# Altium PCB CONTROLLER_PCB.PcbDoc
Units mil, origin at the board's own origin, x right, y up, seen from the top; angles counter-clockwise.
Board outline 1999.6 x 999.6 mil, 2 copper layers (Top Layer, Bottom Layer); 34 components, 44 nets, 176 pads, 122 vias.
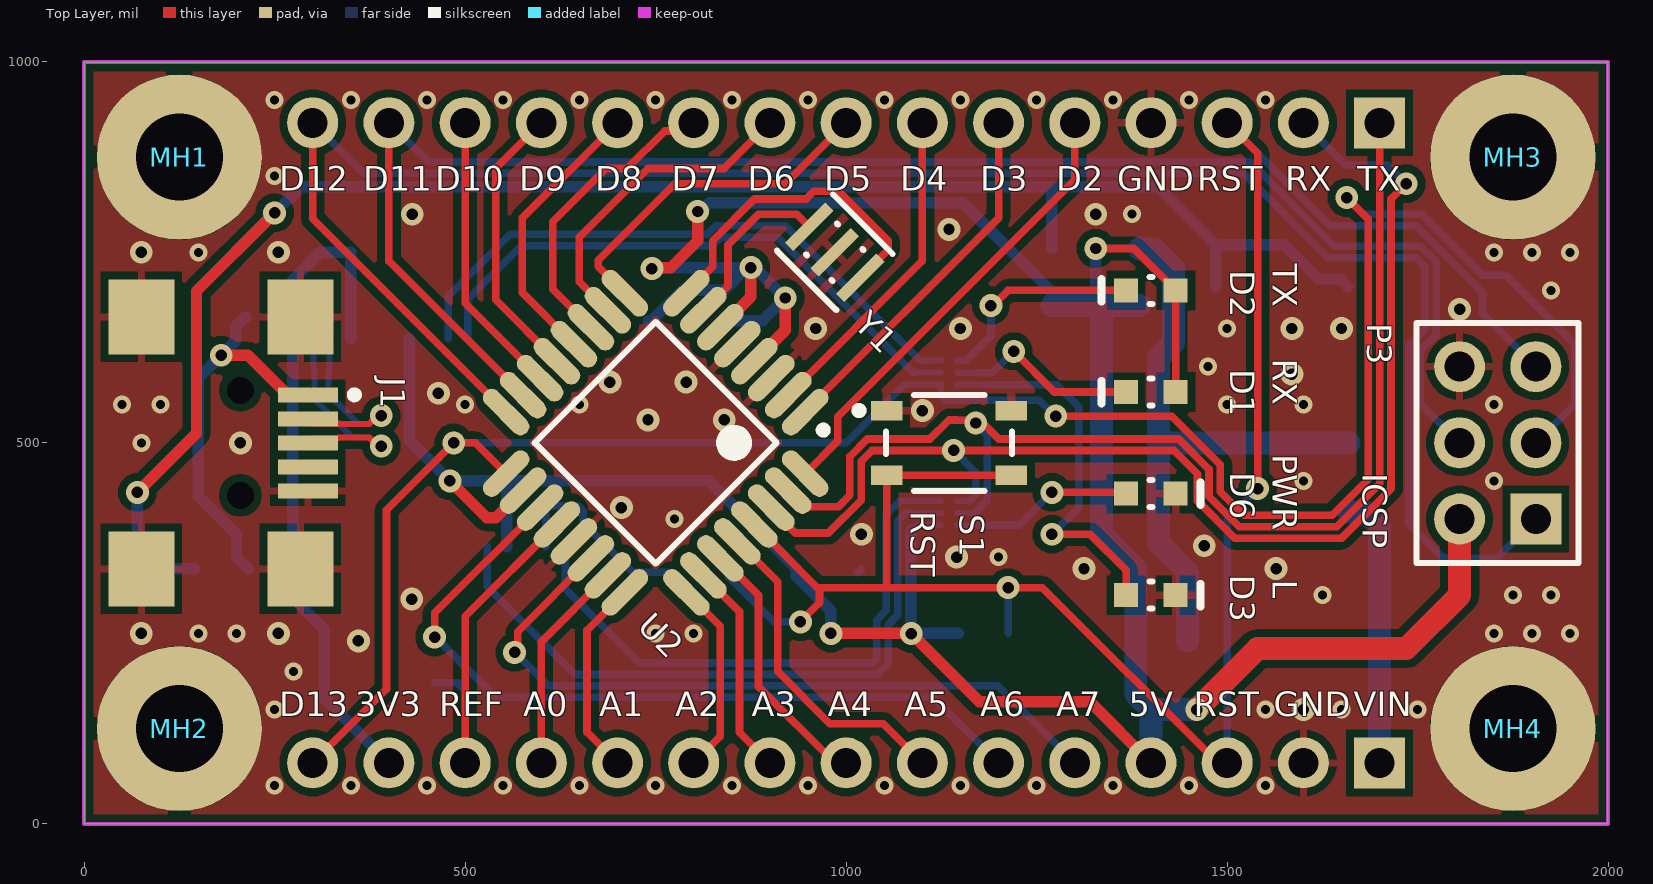
[diagram p0: Top Layer view]
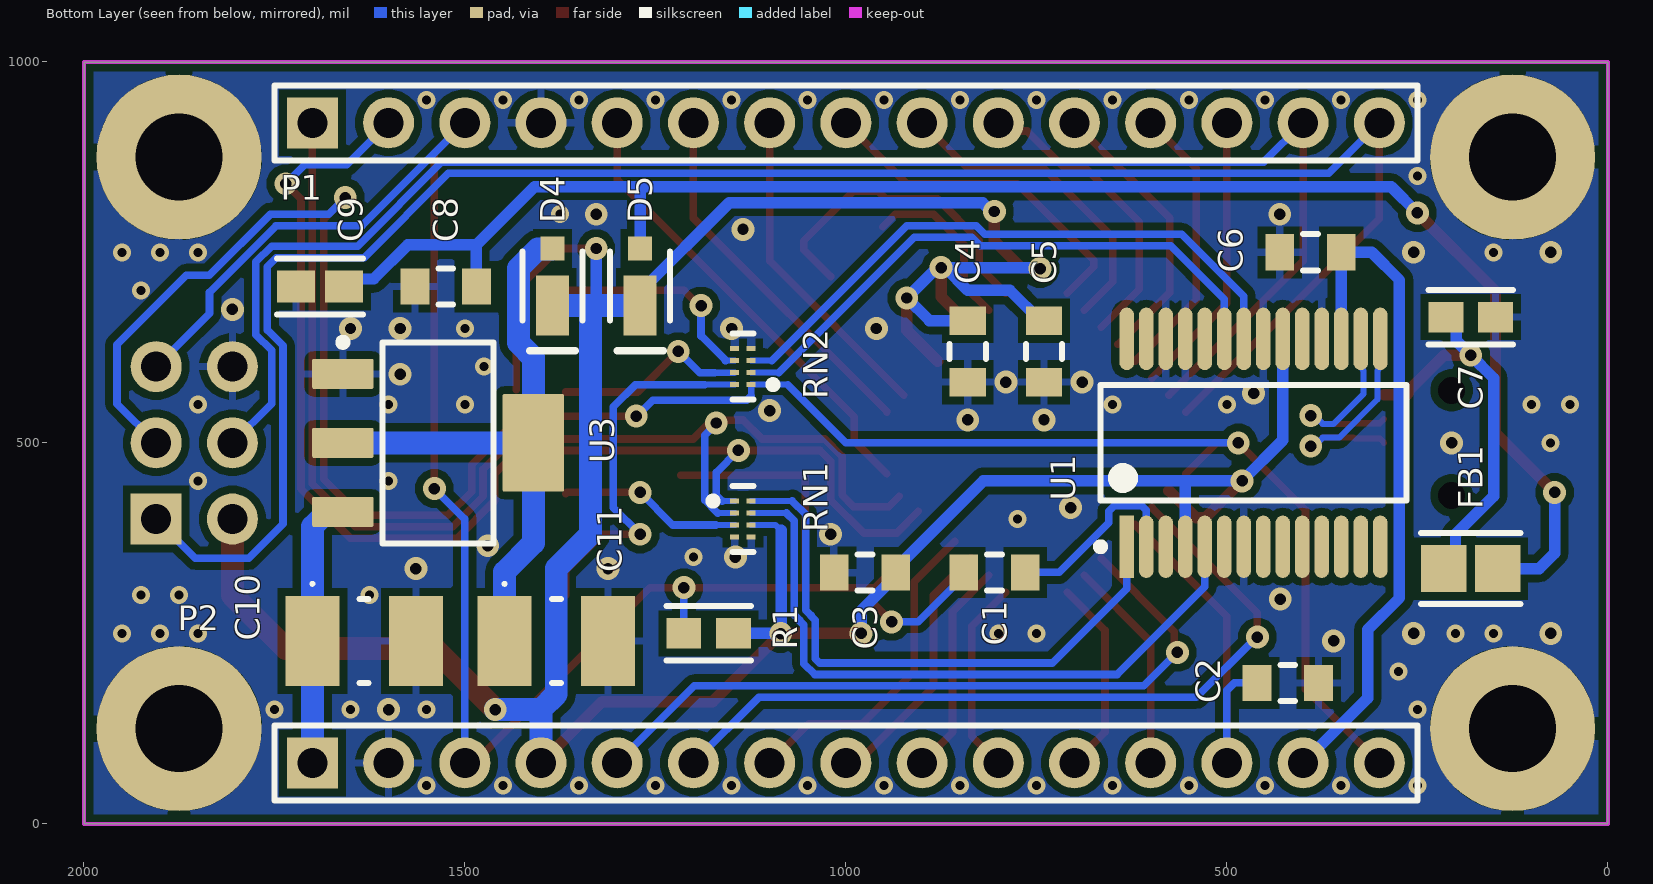
[diagram p1: Bottom Layer view, seen from below]
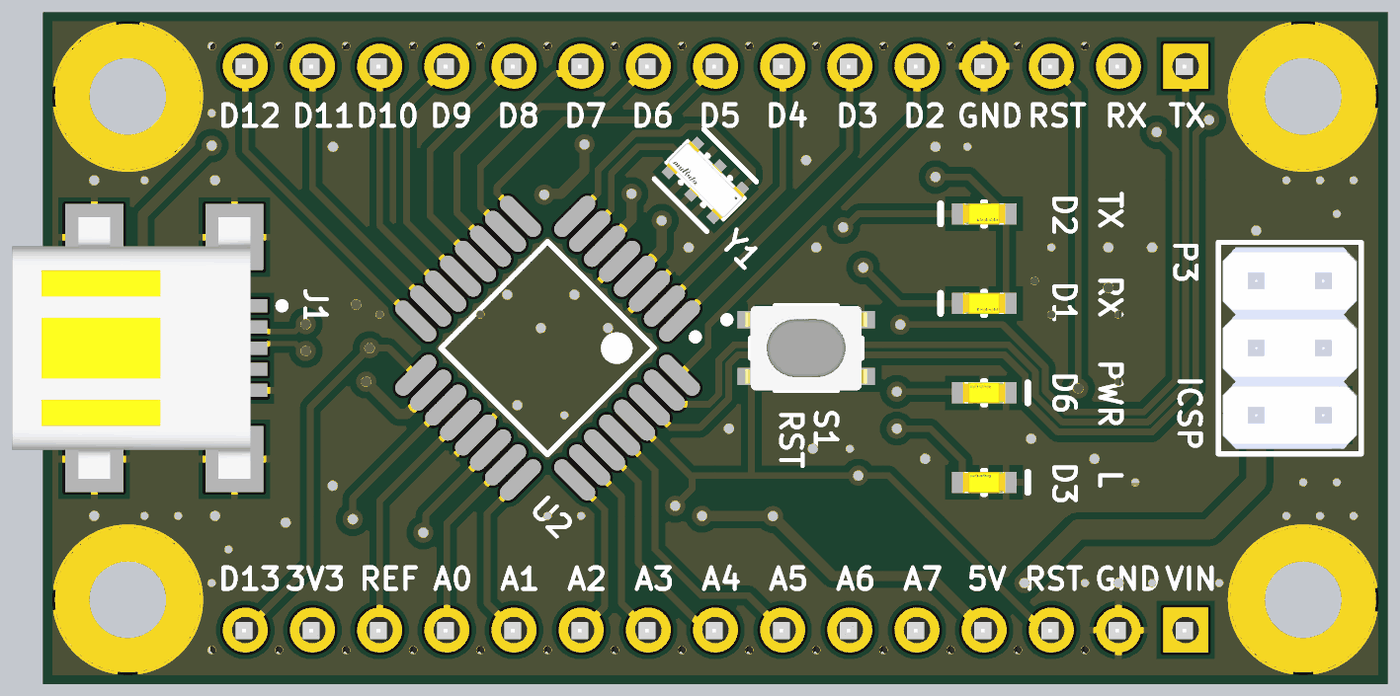
[diagram p2: 3D render of the assembled board from above, using the file's embedded part models]
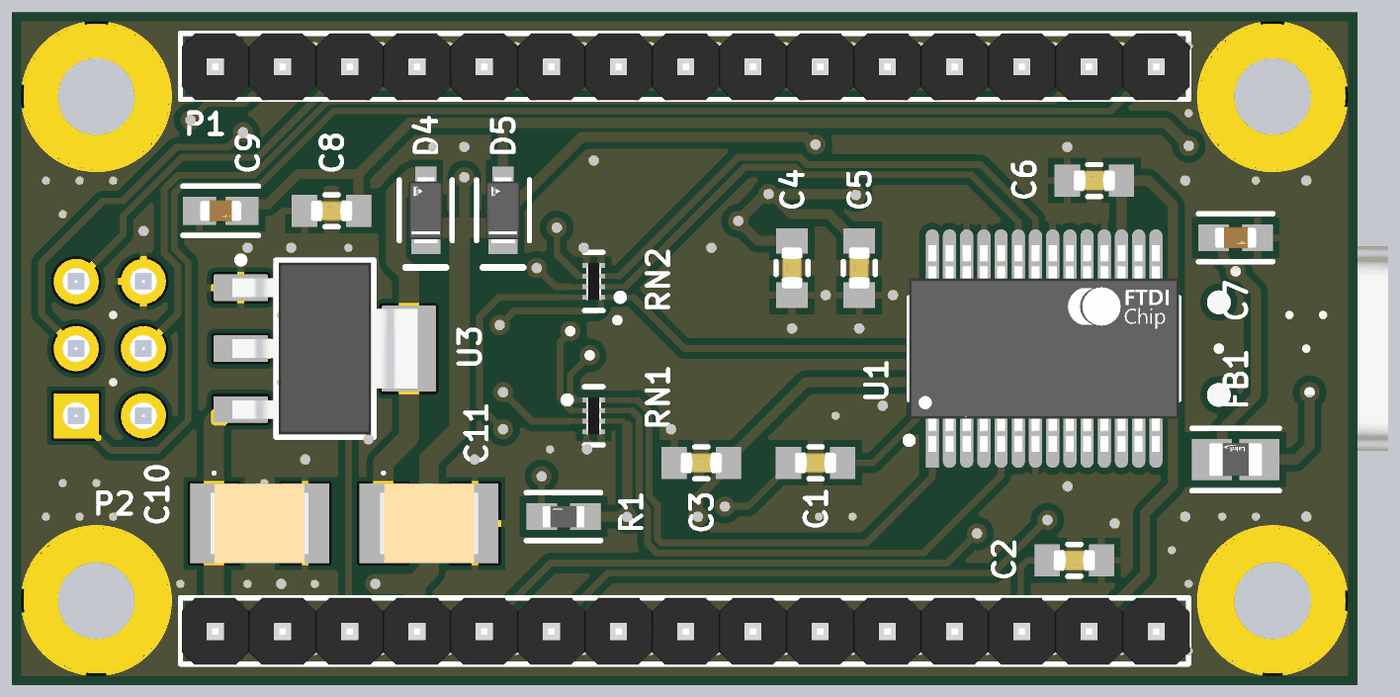
[diagram p3: 3D render of the assembled board from below, using the file's embedded part models]

## Layer stack, top to bottom
Top Solder: solder mask 0.4, Solder Resist, Dk 3.5
Top Layer: signal copper 1.4
Dielectric 1: dielectric 12.6, FR-4, Dk 4.8
Bottom Layer: signal copper 1.4
Bottom Solder: solder mask 0.4, Solder Resist, Dk 3.5

## Board outline
0,0 0,999.6 1999.6,999.6 1999.6,0

## Design rules (kind name [scope] priority, off if disabled: settings)
BoardOutlineClearance [All] p1: gap=7.87 ignorepadtopadclearanceinfootprint=FALSE
Clearance [All] p1: gap=10 ignorepadtopadclearanceinfootprint=TRUE except(0: Arc-Hole Track-Hole SMDPad-Hole THPad-Hole Via-Hole Fill-Hole Poly-Hole Region-Hole Text-Hole; 5: Arc-Arc Arc-Track Track-Track SMDPad-SMDPad; 7.87: Arc-SMDPad Track-SMDPad; 12.99: Arc-THPad Track-THPad; 19.68: THPad-THPad)
DiffPairsRouting DiffPair_90DiffPairsRouting [InDifferentialPairClass('Diff_90')] p1: maxlimit=10 minlimit=10 mostfreqgap=10 toplayer_minwidth=8 toplayer_maxwidth=8 toplayer_prefwidth=8 bottomlayer_minwidth=8 bottomlayer_maxwidth=8 bottomlayer_prefwidth=8 maxuncoupledlength=500
DiffPairsRouting [All] p2: maxlimit=10 minlimit=10 mostfreqgap=10 toplayer_minwidth=15 toplayer_maxwidth=15 toplayer_prefwidth=15 bottomlayer_minwidth=15 bottomlayer_maxwidth=15 bottomlayer_prefwidth=15 maxuncoupledlength=500
HoleSize [All] p1: absolutevalues=TRUE maxlimit=248.03 minlimit=11.81 maxpercent=80.000 minpercent=20.000
MatchedLengths DiffPair_90MatchedLengths [InDifferentialPairClass('Diff_90')] p1: tolerance=1000 checknetsindiffpair=FALSE checkdiffpairvsdiffpair=TRUE checkxsignals=TRUE checkothers=TRUE
MinimumAnnularRing [All] p1: minimumring=5.12
MinimumSolderMaskSliver [All] p1: minsoldermaskwidth=7.87
PolygonConnect PolygonConnect_GNDVia [IsVia AND InNet('GND')] p1: connectstyle=Direct reliefconductorwidth=10 reliefentries=4 polygonreliefangle="90 Angle" airgapwidth=10
PolygonConnect PolygonConnect_1 [All] p2 off: connectstyle=Relief reliefconductorwidth=10 reliefentries=4 polygonreliefangle="90 Angle" airgapwidth=10
RoutingVias [All] p1: holewidth=28 width=50 viastyle="Through Hole" minholewidth=11.81 minwidth=23.62 maxholewidth=248.03 maxwidth=50
SilkToSolderMaskClearance [IsPad] p1: minsilkscreentomaskgap=5.91 clearancetoexposedcopper=TRUE
SolderMaskExpansion [All] p1: expansion=4 istentingtop=FALSE
Width [All] p1: maxlimit=787.4 minlimit=5 preferedwidth=10 minimp=50.000000 maximp=50.000000 favimp=50.000000
26 further rules are at their usual default settings.

## Classes and differential pairs
differential pair class Diff_90: USBD
differential pair USBD: +USBD_P -USBD_N

## Components (designator, comment, footprint, x,y, rotation, side; value= is the part's Value field where it differs from the comment)
C1 "100nF" CAP_0603_TDK_CGA3 805,330 r180 bottom
C2 "100nF" CAP_0603_TDK_CGA3 420,185 r0 bottom
C3 "100nF" CAP_0603_TDK_CGA3 975,330 r180 bottom
C4 "100nF" CAP_0603_TDK_CGA3 840,620 r90 bottom
C5 "100nF" CAP_0603_TDK_CGA3 740,620 r90 bottom
C6 "100nF" CAP_0603_TDK_CGA3 390.2,750 r180 bottom
C7 "10nF" CAP_0603_MRT_GCM 180,665 r180 bottom
C8 "100nF" CAP_0603_TDK_CGA3 1525,705 r180 bottom
C9 "4.7uF" CAP_0603_MRT_GRT 1690,705 r180 bottom
C10 "10uF" PCAP_1411_VSH_TR3B 1632.09,240 r180 bottom
C11 "10uF" PCAP_1411_VSH_TR3B 1380,240 r180 bottom
D1 "GREEN" DIO_LED_GREEN_1608_APT1608 1400,566.67 r0 top
D2 "GREEN" DIO_LED_GREEN_1608_APT1608 1400,700 r0 top
D3 "GREEN" DIO_LED_GREEN_1608_APT1608 1400,300 r180 top
D4 "30V, 1A" DIO_SCHOTTKY_DO_219AP 1385,705.79 r90 bottom
D5 "30V, 1A" DIO_SCHOTTKY_DO_219AP 1270,705.79 r90 bottom
D6 "GREEN" DIO_LED_GREEN_1608_APT1608 1400,433.33 r180 top
FB1 "40X" FERRITE_0805_LRD_MI 180,335 r0 bottom
J1 "UX60A-MB-5ST" CONN_USB_MINIB_FEMALE_SMD_RA 205,500 r270 top locked
MH1 "M2.5" MH_M2.5 125,875 r0 top
MH2 "M2.5" MH_M2.5 125,125 r0 top
MH3 "M2.5" MH_M2.5 1875,875 r0 top
MH4 "M2.5" MH_M2.5 1875,125 r0 top
P1 "PEC15SFAN" CONN_HEADER_MALE_0.1_1x15 1000,920 r90 bottom
P2 "PEC15SFAN" CONN_HEADER_MALE_0.1_1x15 1000,80 r90 bottom
P3 "PEC03DAAN" CONN_HEADER_MALE_0.1_2x3 1855,500 r90 top
R1 "4.7kR" RES_0603_RHM_ESR 1180,250 r180 bottom
RN1 "1kR" RES_NET_0502_PNS_EXB 1135,400 r270 bottom locked
RN2 "1kR" RES_NET_0502_PNS_EXB 1135,600 r90 bottom locked
S1 "PTS810" SW_CAK_PTS810 1135,500 r0 top
U1 "FT232RL" IC_SSOP_28 465,500 r90 bottom locked
U2 "ATMEGA328" IC_32_TQFP_32A 750,500 r225 top locked
U3 "LM1117" IC_SOT223_4_DCYRPDSOG4 1535,500 r180 bottom locked
Y1 "16MHz" OSC_NONSTD_SMD3_MRT_CSTNE 985,750 r315 top

## Footprints (in the part's own frame and the unit in brackets; to place one, negate y for a bottom-side part, rotate by r counter-clockwise, add the part's x,y. Pads: shape width x height; smd on the part's side, far side on the other; paste and mask are expansions set on the pad)
CAP_0603_MRT_GCM [mil] "Capacitor"
  rect 45.62x39.85 smd paste+0 mask+0: 1(-32.55,0) 2(32.55,0)
  silkscreen extent -55,-36 55,36, body extent -31,-16 31,16, height 35
CAP_0603_MRT_GRT [mil] "Capacitor"
  rect 49.46x41.66 smd paste+0 mask+0: 1(-31.53,0) 2(31.53,0)
  silkscreen extent -56,-37 56,37, body extent -31,-16 31,16, height 37
CAP_0603_TDK_CGA3 [mm] "Capacitor"
  rect 0.956x1.206 smd paste+0 mask+0: 1(-1.025,0) 2(1.025,0)
  silkscreen extent -0.25,-0.6 0.25,0.6, body extent -0.8,-0.4 0.8,0.4, height 1.1
CONN_HEADER_MALE_0.1_1x15 [mm] "Connector"
  rect 1.7x1.7 hole 1: 1(0,17.78)
  round 1.7 hole 1: 2(0,15.24) 3(0,12.7) 4(0,10.16) 5(0,7.62) 6(0,5.08) 7(0,2.54) 8(0,0) 9(0,-2.54) 10(0,-5.08) 11(0,-7.62) 12(0,-10.16) 13(0,-12.7) 14(0,-15.24) 15(0,-17.78)
  silkscreen extent -1.25,-19.05 1.25,19.05, body extent -1.29,-19.1 1.25,19, height 10.49
CONN_HEADER_MALE_0.1_2x3 [mm] "Connector"
  rect 1.7x1.7 hole 1: 1(-2.54,-1.27)
  round 1.7 hole 1: 2(-2.54,1.27) 3(0,-1.27) 4(0,1.27) 5(2.54,-1.27) 6(2.54,1.27)
  silkscreen extent -4,-2.7 4,2.7, body extent -3.81,-2.54 3.81,2.54, height 8.25
CONN_USB_MINIB_FEMALE_SMD_RA [mm] "SMD, 5-Leads, Body 7.7x9mm, Pitch 0.8mm"
  rect 0.5x2 smd: 1(-1.6,2.25) 2(-0.8,2.25) 3(0,2.25) 4(0.8,2.25) 5(1.6,2.25)
  rect 2.5x2.2 smd: 6(-4.2,2) 7(4.2,2) 8(-4.2,-3.3) 9(4.2,-3.3)
  round 0.6 hole 0.9 unplated: 10(-1.75,0) 11(1.75,0)
  silkscreen extent -1.72,3.68 -1.48,3.93, body extent -4.95,-6.4 4.95,2.6, height 4.6
DIO_LED_GREEN_1608_APT1608 [mm] "Diode, Green LED"
  rect 0.8x0.8 smd paste+0 mask+0: 1(-0.825,0) 2(0.825,0)
  silkscreen extent -1.65,-0.45 0.05,0.45, body extent -1.33,-0.55 1.33,0.55, height 0.25
DIO_SCHOTTKY_DO_219AP [mm] "Diode, Schottky"
  rect 0.8x0.8 smd paste+0 mask+0: A(1.25,0)
  rect 2x1.1 smd paste+0 mask+0: K(-0.65,0)
  silkscreen extent -2.16,-1 1.15,1, body extent -1.25,-0.65 1.25,0.65, height 0.73
FERRITE_0805_LRD_MI [mil] "Ferrite Bead"
  rect 59.63x61.27 smd paste+0 mask+0: 1(-35.27,0) 2(35.27,0)
  silkscreen extent -65,-46 65,46, body extent -39,-25 39,25, height 43
IC_32_TQFP_32A [mm] "Thin QFP, 32-Leads, Body 7x7mm, Pitch 0.8mm, IPC Low Density"
  oval 1.95x0.6 smd: 1(-4.25,2.8) 2(-4.25,2) 3(-4.25,1.2) 4(-4.25,0.4) 5(-4.25,-0.4) 6(-4.25,-1.2) 7(-4.25,-2) 8(-4.25,-2.8) 17(4.25,-2.8) 18(4.25,-2) 19(4.25,-1.2) 20(4.25,-0.4) 21(4.25,0.4) 22(4.25,1.2) 23(4.25,2) 24(4.25,2.8)
  oval 0.6x1.95 smd: 9(-2.8,-4.25) 10(-2,-4.25) 11(-1.2,-4.25) 12(-0.4,-4.25) 13(0.4,-4.25) 14(1.2,-4.25) 15(2,-4.25) 16(2.8,-4.25) 25(2.8,4.25) 26(2,4.25) 27(1.2,4.25) 28(0.4,4.25) 29(-0.4,4.25) 30(-1.2,4.25) 31(-2,4.25) 32(-2.8,4.25)
  silkscreen extent -4.37,-2.85 2.85,3.77, body extent -3.5,-3.5 3.5,3.5, height 1.2
IC_SOT223_4_DCYRPDSOG4 [mm] "SOT223, 4-Leads, Body 6.7x3.7mm, Pitch 2.3mm, IPC Low Density"
  rrect10% 2.05x1 smd: 1(-3.175,2.3) 2(-3.175,0) 3(-3.175,-2.3)
  rrect5% 2.05x3.25 smd: 4(3.175,0)
  silkscreen extent -3.3,-3.35 1.85,3.47, body extent -3.5,-3.25 3.5,3.25, height 1.62
IC_SSOP_28 [mm] "Integrated Circuit"
  rect 2.082x0.495 smd paste+0 mask+0: 1(-3.464,4.225)
  rrect100% 2.082x0.495 smd paste+0 mask+0: 2(-3.464,3.575) 3(-3.464,2.925) 4(-3.464,2.275) 5(-3.464,1.625) 6(-3.464,0.975) 7(-3.464,0.325) 8(-3.464,-0.325) 9(-3.464,-0.975) 10(-3.464,-1.625) 11(-3.464,-2.275) 12(-3.464,-2.925) 13(-3.464,-3.575) 14(-3.464,-4.225) 15(3.464,-4.225) 16(3.464,-3.575) 17(3.464,-2.925) 18(3.464,-2.275) 19(3.464,-1.625) 20(3.464,-0.975) 21(3.464,-0.325) 22(3.464,0.325) 23(3.464,0.975) 24(3.464,1.625) 25(3.464,2.275) 26(3.464,2.925) 27(3.464,3.575) 28(3.464,4.225)
  silkscreen extent -3.59,-5.1 1.92,5.23, body extent -3.9,-5.1 3.9,5.1, height 2
MH_M2.5 [mm] "Mounting Holes, M2.5"
  round 5.5 hole 2.9: 1(0,0)
OSC_NONSTD_SMD3_MRT_CSTNE [mm] "Oscillator"
  rect 0.4x1.9 smd paste+0 mask+0: 1(-1.2,0) 2(0,0) 3(1.2,0)
  silkscreen extent -1.4,-1.33 1.4,1.33, body extent -1.78,-1.05 1.78,1.05, height 0.25
PCAP_1411_VSH_TR3B [mm] "Polarized Capacitor"
  rect 1.8x3 smd: 1(-1.725,0) 2(1.725,0)
  silkscreen extent -1.77,-1.4 0.15,1.95, body extent -1.85,-1.5 1.85,1.5, height 2.12
RES_0603_RHM_ESR [mil] "Resistor"
  rect 45.6x39.85 smd paste+0 mask+0: 1(-32.56,0) 2(32.56,0)
  silkscreen extent -55,-36 55,36, body extent -31,-16 31,16, height 22
RES_NET_0502_PNS_EXB [mm] "Resistor Network"
  rect 0.175x0.3 smd paste+0 mask+0: 1(-0.6,-0.275) 2(-0.2,-0.275) 3(0.2,-0.275) 4(0.6,-0.275) 5(0.6,0.275) 6(0.2,0.275) 7(-0.2,0.275) 8(-0.6,0.275)
  silkscreen extent -1.1,-1.13 1.1,0.35, body extent -0.7,-0.3 0.7,0.3, height 0.45
SW_CAK_PTS810 [mm] "Switch"
  rect 1.05x0.65 smd paste+0 mask+0: 1(-2.075,1.075) 2(2.075,1.075) 3(-2.075,-1.075) 4(2.075,-1.075)
  silkscreen extent -3.12,-1.6 2.1,1.6, body extent -2.7,-1.7 2.7,1.7, height 0.25

## Part data
C1 C2 C3 C4 C5 C6 C8: library part CAP_100nF_10%_50V, "±10% 50V Ceramic Capacitor X7R 0603 (1608 Metric)", Case/Package="0603 (1608 Metric)", Manufacturer="TDK Corporation", Manufacturer Part Number=CGA3E2X7R1H104K080AA, Supplier Part Number 1=445-5666-1-ND, Supplier 1=Digi-Key
C7: library part CAP_10nF_10%_100V, "±10% 100V Ceramic Capacitor X7R 0603 (1608 Metric)", Case/Package="0603 (1608 Metric)", Manufacturer="Murata Electronics", Manufacturer Part Number=GCM188R72A103KA37D, Supplier Part Number 1=490-4781-1-ND, Supplier 1=Digi-Key
C9: library part CAP_4.7uF_10%_25V, "±10% 25V Ceramic Capacitor X5R 0603 (1608 Metric)", Case/Package="0603 (1608 Metric)", Manufacturer="Murata Electronics", Manufacturer Part Number=GRT188R61E475KE13D, Supplier Part Number 1=490-12328-1-ND, Supplier 1=Digi-Key
C10 C11: library part PCAP_10uF_10%_25V, "Molded Tantalum Capacitors 1411 (3528 Metric) 1.1Ohm", Case/Package="1411 (3528 Metric)", Manufacturer="Vishay Sprague", Manufacturer Part Number=TR3B106K025C1100, Supplier Part Number 1=718-1312-1-ND, Supplier 1=Digi-Key
D1 D2 D3 D6: library part DIO_LED_GREEN, "Green 570nm LED Indication - Discrete 2.1V 0603 (1608 Metric)", Case/Package="0603 (1608 Metric)", Manufacturer=Kingbright, Manufacturer Part Number=APT1608CGCK, Supplier Part Number 1=754-1116-1-ND, Supplier 1=Digi-Key
D4 D5: library part DIO_SCHOTTKY_30V_1A, "Diode Schottky 1A Surface Mount MicroSMP (DO-219AD)", Case/Package="MicroSMP (DO-219AD)", Manufacturer="Vishay General Semiconductor - Diodes Division", Manufacturer Part Number=MSS1P3L-M3/89A, Supplier Part Number 1=MSS1P3L-M3/89AGICT-ND, Supplier 1=Digi-Key
FB1: library part FERRITE_40X_1.5A, "Power Line Ferrite Bead 0805 (2012 Metric) 1.5A 50mOhm", Case/Package="0805 (2012 Metric)", Manufacturer="Laird-Signal Integrity Products", Manufacturer Part Number=MI0805K400R-10, Supplier Part Number 1=240-2389-1-ND, Supplier 1=Digi-Key
J1: library part CONN_USB_MINIB_FEMALE_SMD_RA, "USB - mini B USB 2.0 Receptacle Connector 5 Position Surface Mount, Right Angle", Case/Package="USB - mini B", Manufacturer="Hirose Electric Co LtdInc.", Supplier Part Number 1=H2961CT-ND, Manufacturer Part Number=UX60A-MB-5ST, Supplier 1=Digi-Key
MH1 MH2 MH3 MH4: library part MH_M2.5, "M2.5 Mounting Hole"
P1 P2: library part CONN_VERT_HEADER_MALE_0.1_1x15, "Connector Header Through Hole 15 position 0.100\" (2.54mm)", Case/Package="Header, Breakaway", Manufacturer="Sullins Connector Solutions", Supplier Part Number 1=S1212E-15-ND, Manufacturer Part Number=PEC15SFAN, Supplier 1=Digi-Key
P3: library part CONN_VERT_HEADER_MALE_0.1_2x3, "Connector Header Through Hole 6 position 0.100\" (2.54mm)", Case/Package="Header, Breakaway", Manufacturer="Sullins Connector Solutions", Supplier Part Number 1=S2012E-03-ND, Manufacturer Part Number=PEC03DAAN, Supplier 1=Digi-Key
R1: library part RES_4.7kR_5%_0.25W, "±5% 0.25W, 1/4W Chip Resistor 0603 (1608 Metric) Automotive AEC-Q200, Pulse Withstanding Thick Film", Case/Package="0603 (1608 Metric)", Manufacturer="Rohm Semiconductor", Manufacturer Part Number=ESR03EZPJ472, Supplier Part Number 1=RHM4.7KDCT-ND, Supplier 1=Digi-Key
RN1 RN2: library part RES_NET_1kR_5%_31mW, "1k Ohm ±5% 31mW Power Per Element Isolated 4 Resistor Network/Array ±200ppm/°C 0502 (1406 Metric), Long Side Terminals", Case/Package="0502 (1406 Metric), Long Side Terminal", Manufacturer="Panasonic Electronic Components", Manufacturer Part Number=EXB-18V102JX, Supplier Part Number 1=Y6102CT-ND, Supplier 1=Digi-Key
S1: library part SW_SPST_NO, "Tactile Switch SPST-NO Top Actuated Surface Mount", Case/Package="4.20mm x 3.20mm", Manufacturer=C&K, Manufacturer Part Number="PTS810 SJG 250 SMTR LFS", Supplier Part Number 1=CKN10504CT-ND, Supplier 1=Digi-Key
U1: library part IC_FT232RL, "USB Bridge, USB to UART USB 2.0 UART Interface 28-SSOP", Case/Package="28-SSOP (0.209\", 5.30mm Width)", Manufacturer="FTDI, Future Technology Devices International Ltd", Manufacturer Part Number=FT232RL-REEL, Supplier Part Number 1=768-1007-1-ND, Supplier 1=Digi-Key
U2: library part IC_ATMEGA328, "8-bit Microcontrollers - MCU AVR 32K FLSH 2K SRAM 1KB EE-20 MHZ 105C", Case/Package=TQFP-32, Manufacturer="Microchip Technology / Atmel", Manufacturer Part Number=ATMEGA328P-AN, Supplier Part Number 1=556-ATMEGA328P-AN, Supplier 1="Mouser Electronics"
U3: library part IC_LM1117, "Linear Voltage Regulator IC Positive Fixed Output 800mA SOT-223-4", Case/Package="TO-261-4, TO-261AA", Manufacturer="Texas Instruments", Manufacturer Part Number=LM1117IMPX-5.0/NOPB, Supplier Part Number 1=LM1117IMPX-5.0/NOPBCT-ND, Supplier 1=Digi-Key
Y1: library part OSC_CER_16MHz, "Ceramic Resonator Built in Capacitor ±0.15% -40°C ~ 125°C Surface Mount", Case/Package="3-SMD, Non-Standard", Manufacturer="Murata Electronics", Manufacturer Part Number=CSTNE16M0V53C000R0, Supplier Part Number 1=490-17949-1-ND, Supplier 1=Digi-Key

## Via types
v1: diameter 23.62, hole 11.81, Top Layer to Bottom Layer, tented both sides, 64 vias
v2: diameter 30, hole 15, Top Layer to Bottom Layer, tented both sides, 58 vias

## Nets (pads, with @x,y where several pads share a name; then routed paths per layer and width w, separated by ;. In a path a pad name is that pad's centre, name@x,y a point inside that pad or via, vN(x,y) a via of type N, cw(c..) or ccw(c..) an arc to the next point about the centre after c; other vN are vias at no path point)
+3V3: C6.2 P2.14 U1.17 | length 890.7
  Bottom Layer w15: U1.17 C6.2@349.84,749.8 ; C6.2 310,750 273.54,713.54 273.54,296.46 315,255 315,165 P2.14
+5: C3.2 C4.2 C5.2 D1.2 D2.2 D4.K D5.K P2.4 P3.2 R1.2 RN1.6 U1.4 U1.20 U2.4 U2.6 U2.18 | length 4705.8
  Top Layer w10: v2(1327.5,755) 1377.48,755 D2.2 D1.2@1432.48,570
  Top Layer w15: v2(480,450) 528.11,401.89 540.54,401.89 U2.18 ; v2(745,728.54) 746.46,730 770,730 805,765 v2(805,803.54) ; U2.6 875,691.81 v2(875,730) ; U2.4 920,647.73 v2(920,690) ; v2(980,250) 980.16,249.84 1085.31,249.84 v2(1085.48,249.67) ; v2@1085,250 1174.55,160.45 1319.55,160.45 P2.4
  Top Layer w30: v2(1460,150) 1540,230 1735,230 1805,300 P3.2
  Bottom Layer w8: 1085,385 1092.13,392.13 RN1.6
  Bottom Layer w15: U1.20 426.61,503.39 v2(480,450) 554.57,450 ; U1.4 554.57,450 ; C5.2 744.92,660.35 784.57,700 840,700 v2@870,730 ; v2(745,728.54) 746.46,730 v2@870,730 ; v2(805,803.54) 809.06,803.54 820.52,815 1152.91,815 1270,697.91 D5.K ; C4.2 890.35,660.35 v2(920,690) 875,735 v2@870,730 ; v2(875,730) v2@870,730 ; C3.2 C3.2@934.65,325.08 ; v2(980,250) 980,279.72 C3.2@934.65,325.08 ; v2@1085,250 R1.2 ; 1085,385 1085,250.15 v2(1085.48,249.67) ; 1327.5,680.2 v2(1327.5,755) ; 554.57,450 819.57,450 934.65,334.92 C3.2@934.65,325.08
  Bottom Layer w30: D5.K 1327.5,680.2 1384.8,680.2 D4.K@1385,680 ; 1335,680 1335,380 1380,335 1380,170 1400,150 ; P2.4 1400,150 ; v2(1460,150) 1400,150
A0: P2.12 U2.23 | length 282.2
  Top Layer w10: P2.12 600,238.64 U2.23
A1: P2.11 U2.24 | length 260.9
  Top Layer w10: P2.11 660,120 660,254.1 U2.24
A2: P2.10 U2.25 | length 256.7
  Top Layer w10: U2.25 835,259.1 835,115 P2.10
A3: P2.9 U2.26 | length 282.2
  Top Layer w10: U2.26 860,278.64 860,120 P2.9
A4: P2.8 U2.27 | length 346.5
  Top Layer w10: U2.27 836.72,348.28 885,300 885,180 985,80 P2.8
A5: P2.7 U2.28 | length 432.1
  Top Layer w10: U2.28 910,317.73 910,200 978.54,131.46 1048.54,131.46 P2.7
A6: P2.6 U2.19 | length 1035.7
  Top Layer w10: v2(460,245) 460,276.81 U2.19
  Bottom Layer w10: v2(460,245) 461.13,245 540.09,166.03 1113.97,166.03 P2.6
A7: P2.5 U2.22 | length 959.8
  Top Layer w10: v2(565,225) 568.83,228.83 568.83,252.01 U2.22
  Bottom Layer w10: v2(565,225) 608.97,181.03 1198.97,181.03 P2.5
AREF: C2.2 P2.13 U2.20 | length 501.5
  Top Layer w10: P2.13 500,272.27 U2.20
  Bottom Layer w10: C2.2 490,185 500,175 P2.13
D0/RX: P1.2 RN1.1 U2.30 | length 1666.1
  Top Layer w10: U2.30@905,410 933.32,381.68 976.68,381.68 1019.76,424.76 1019.76,475.81 1033.96,490 v2(1141,490) 1430,490 1461.1,458.9 1461.1,423.65 1509.75,375 1650,375 1715,440 1715,820 v2(1735,840)
  Bottom Layer w8: RN1.1 1162.2,423.62
  Bottom Layer w10: v2(1141,490) 1170,461 1170,431.42 1162.2,423.62 ; P1.2 1655,865 1710,865 v2(1735,840)
D1/TX: P1.1 RN1.2 U2.31 | length 1583.6
  Top Layer w10: U2.31@930.07,430 943.91,416.16 989.94,416.16 1004.76,430.98 1004.76,482.02 1027.75,505 1110,505 1135,530 1145,530 1145.17,529.83 1166.17,529.83 v2(1170,526) ; v2@1170,530 1175.41,530 1200.41,505 1436.21,505 1476.1,465.11 1476.1,429.86 1515.96,390 1643.79,390 1700,446.21 P1.1
  Bottom Layer w8: RN1.2 1167.87,407.87
  Bottom Layer w10: 1167.87,407.87 1185,425 1185,510 1170,525 v2(1170,526)
D2: P1.5 U2.32 | length 609
  Top Layer w10: U2.32 989.01,502.38 989.01,534.01 1300,845 1300,915 P1.5@1295,920
D3: P1.6 U2.1 | length 484.7
  Top Layer w10: U2.1 946.26,541.26 1200,795 P1.6
D4: P1.7 U2.2 | length 430.3
  Top Layer w10: U2.2 1100,738.64 P1.7
D5: P1.8 U2.9 | length 458
  Top Layer w10: U2.9 674.59,731.31 674.59,739.59 775,840 920,840 P1.8
D6: P1.9 U2.10 | length 423.6
  Top Layer w10: U2.10 650,711.36 650,770 740,860 840,860 P1.9
D7: P1.10 U2.11 | length 397.9
  Top Layer w10: U2.11 615,701.81 615,790 685,860 712.77,860 761.88,909.11 789.11,909.11 P1.10
D8: P1.11 U2.12 | length 370.4
  Top Layer w10: U2.12 575,697.27 575,795 P1.11
D9: P1.12 U2.13 | length 371
  Top Layer w10: P1.12 540,860 540,687.73 U2.13
D10: P1.13 U2.14 | length 375.8
  Top Layer w10: P1.13 500,683.19 U2.14
D11/MOSI: P1.14 P3.4 U2.15 | length 2147.3
  Top Layer w10: P1.14 400,738.64 U2.15
  Bottom Layer w10: P1.14 451.46,868.54 1530.24,868.54 1640.71,758.08 1753.43,758.08 1774.14,737.38 1774.14,641.91 1753.54,621.31 1753.54,551.46 P3.4
D12/MISO: P1.15 P3.1 U2.16 | length 2574.6
  Top Layer w10: P1.15 300,794.1 U2.16
  Bottom Layer w10: P1.15 366.46,853.54 1521.46,853.54 1631.92,743.08 1747.22,743.08 1759.14,731.16 1759.14,648.12 1738.54,627.53 1738.54,393.69 1783.69,348.54 1853.54,348.54 P3.1
D13/SCK: P2.15 P3.3 RN2.1 U2.17 | length 2841.6
  Top Layer w10: P2.15 396.77,176.77 396.77,411.77 465,480 v2(485,500) 513.37,500 U2.17 ; v2(1275,535) 1427.43,535 1491.1,471.32 1491.1,436.07 1522.18,405 1637.57,405 1685,452.43 1685,793.64 v2(1656.82,821.82)
  Bottom Layer w8: 1076.38,576.38 RN2.1 ; 1124.17,561.94 RN2.1@1124.17,573.94
  Bottom Layer w10: v2(485,500) 1000,500 1076.38,576.38 ; 1124.17,561.94 1130.11,556 1253.57,556 1274.57,535 v2(1275,535) ; v2(1656.82,821.82) 1678.64,800 1755,800 1835.35,719.65 1865.35,719.65 1956.46,628.54 1956.46,551.46 P3.3
GND: C2.1 C3.1 C4.1 C5.1 C6.1 C7.2 C8.1 C9.1 C10.2 C11.2 D3.1 D6.1 J1.5 J1.6 J1.7 J1.8 J1.9 MH1.1 MH2.1 MH3.1 MH4.1 P1.4 P2.2 P3.6 RN1.4 RN1.5 RN2.4 RN2.5 S1.1 S1.2 U1.7 U1.18 U1.21 U1.25 U1.26 U2.3 U2.5 U2.21 U3.1 Y1.2 | length 6.6
  Bottom Layer w10: C3.1@1015.35,329.65 C3.1@1020,334.29
  other v1: 250,50 350,50 450,50 550,50 650,50 750,50 850,50 950,50 1050,50 1150,50 1250,50 1350,50 1450,50 1550,50 250,150 1550,150 1650,150 1750,150 275,200 150,250 200,250 750,250 800,250 1850,250 1900,250 1950,250 1625,300 1875,300 1925,300 1200,350 775,400 1600,450 1850,450 75,500 50,550 100,550 500,550 650,550 1500,550 1600,550 1850,550 1475,600 1500,650 1925,700 150,750 1850,750 1900,750 1950,750 1375,800 250,850 250,950 350,950 450,950 550,950 650,950 750,950 850,950 950,950 1050,950 1150,950 1250,950 1350,950 1450,950 1550,950
  other v2: 1600,150 360,240 75,250 255,250 430,295 1312.09,335 1564.17,335 1145,350 1470,365 1020,380 705,415 205,500 740,530 840,530 1100,542.32 465,565 690,579.65 790,579.65 1585,590 960,650 1150,650 1585,650 1650,650 1805,675 75,750 255,750 1135,780 430.55,800 1327.5,800
NetC1_2: C1.2 U1.2 | length 254.7
  Bottom Layer w10: U1.2 605.75,411.64 611.61,417.5 647.5,417.5 655,410 655,395 720,330 C1.2@765,330
NetC7_1: C7.1 FB1.2 J1.1 | length 520.5
  Top Layer w15: v2(180,615) 215,615 261.71,568.29 261.71,565.33 264.06,562.99 J1.1
  Bottom Layer w15: C7.1 211.42,665 199,652.58 199,634 v2(180,615) 150,585 150,430 200,380 200,350.27 FB1.2
NetC11_1: C11.1 D4.A U3.2 U3.4 | length 818.1
  Bottom Layer w30: D4.A 1385.75,754.25 1404.32,754.25 1429.53,729.04 1429.53,631.35 1410,611.82 U3.4 ; C11.1 1447.91,330.52 1410,368.43 U3.4 ; U3.2 U3.4
NetD1_1: D1.1 RN2.7 | length 255.5
  Top Layer w10: v2(1220,620) 1273.33,566.67 D1.1
  Bottom Layer w8: RN2.7 1146.05,591.9 1171.9,591.9
  Bottom Layer w10: 1171.9,591.9 1191.9,591.9 v2(1220,620)
NetD2_1: D2.1 RN2.6 | length 283.3
  Top Layer w10: v2(1190,680) 1192.43,680 1212.43,700 D2.1
  Bottom Layer w8: RN2.6 1157.87,607.87
  Bottom Layer w10: 1157.87,607.87 1157.87,608.11 1190,640.24 v2(1190,680)
NetD3_2: D3.2 RN2.8 | length 502.8
  Top Layer w10: v2(1270,380) 1320,380 1367.52,332.48 D3.2
  Bottom Layer w8: RN2.8 1185,576.38
  Bottom Layer w10: 1185,576.38 1276.05,576.38 1305,547.43 1305,415 v2(1270,380)
NetD6_2: D6.2 RN1.3 | length 240.1
  Top Layer w10: v2(1270,435) 1365.85,435 D6.2
  Bottom Layer w8: RN1.3 1170.94,392.13
  Bottom Layer w10: 1170.94,392.13 1227.13,392.13 v2(1270,435)
NetRN2_2: RN2.2 U1.23 | length 780.3
  Bottom Layer w8: 1087.87,592.13 RN2.2
  Bottom Layer w10: U1.23 503.39,688.39 573.54,758.54 823.64,758.54 835.1,770 910,770 1087.87,592.13
NetRN2_3: RN2.3 U1.22 | length 814.1
  Bottom Layer w8: 1097.13,607.87 RN2.3
  Bottom Layer w10: U1.22 477.8,692.36 558.98,773.54 817.43,773.54 828.88,785 920,785 1097.13,607.87
NetU2_7: U2.7 Y1.1 | length 229.4
  Top Layer w10: U2.7 845,706.36 845,760 885,800 935,800 Y1.1
NetU2_8: U2.8 Y1.3 | length 428.4
  Top Layer w10: U2.8 825,730.9 825,765.25 879.75,820 947.45,820 957.45,830 990,830 1055,765 1055,753.19 Y1.3@1020,718.19
RESET: C1.1 P1.3 P2.3 P3.5 R1.1 S1.3 S1.4 U2.29 | length 2729.1
  Top Layer w10: U2.29 965,307.27 ; v2(940,265) 964.3,289.3 ; 965,290 965,310 1053.31,310 ; S1.4 S1.3 1053.31,310 ; P2.3 1487.57,80 1257.57,310 v2(1212.56,310) 1053.31,310 ; P1.3 1540,880 v2(1540,440)
  Bottom Layer w10: C1.1 845.35,325.08 905,265.43 939.57,265.43 v2(940,265) ; R1.1 1212.56,307.56 v2@1215,310 ; P2.3 1500,400 v2(1540,440) ; P1.3 1635,785 1747.73,785 1835,697.73 1835,670 P3.5
RX: RN1.8 U1.1 | length 779.8
  Bottom Layer w8: 1070.09,423.62 RN1.8
  Bottom Layer w10: U1.1 631.34,308.66 728.97,211.03 1034.14,211.03 1040,216.89 1040,267.14 1045.8,272.94 1045.8,273.63 1052.5,280.33 1052.5,406.03 1070.09,423.62
TX: RN1.7 U1.5 | length 885.7
  Bottom Layer w8: 1077.87,407.87 RN1.7
  Bottom Layer w10: U1.5 528.98,311.02 643.97,196.03 1041.03,196.03 1055,210 1055,260.93 1060.8,266.73 1060.8,267.42 1067.5,274.12 1067.5,397.5 1077.87,407.87
USBD_N: J1.2 U1.16 | length 267.9
  Top Layer w8: J1.2 299.43,525.65 332.73,525.65 333.64,524.75 374.31,524.75 385.31,535.75 v2(390,535.75)
  Bottom Layer w8: U1.16 322.05,634.18 322.05,596.3 320.46,594.71 320.46,564.28 359.99,524.75 374.31,524.75 385.31,535.75 v2(390,535.75)
USBD_P: J1.3 U1.15 | length 297.7
  Top Layer w8: J1.3 299.43,505.84 332.73,505.84 333.64,506.75 374.31,506.75 385.31,495.75 v2(390,495.75)
  Bottom Layer w8: U1.15 300.86,634.18 300.86,596.3 302.46,594.71 302.46,556.82 352.53,506.75 374.31,506.75 385.31,495.75 v2(390,495.75)
VIN: C10.1 P2.1 U3.3 | length 358.1
  Bottom Layer w30: U3.3 1680.67,409.45 1700,390.12 C10.1 P2.1
VUSB: C8.2 C9.2 D5.A FB1.1 | length 2216.4
  Top Layer w15: v2(70,435) 147.5,512.5 147.5,699.18 248.32,800 v2@250,800
  Bottom Layer w15: v2(70,435) 70,355 90,335 FB1.1 ; v2(250,801.68) 284.36,836.04 1269.98,836.04 ; D5.A 1269.98,836.04 ; C8.2 1484.98,705.33 1484.98,759.65 ; C9.2 1648.47,715 1619.66,715 1575.02,759.65 1484.98,759.65 ; 1269.98,836.04 1408.58,836.04 1484.98,759.65
pads on no net: J1.4 J1.10 J1.11 U1.3 U1.6 U1.8 U1.9 U1.10 U1.11 U1.12 U1.13 U1.14 U1.19 U1.24 U1.27 U1.28

## Polygon pours and split planes (outlines as drawn)
GND on Top Layer "GND" (solid, remove dead copper, pour order 0): 0,0 0,1000 2000,1000 2000,0
GND on Bottom Layer "GND" (solid, remove dead copper, pour order 1): 0,0 0,1000 2000,1000 2000,0

## Keep-outs
Keep-Out Layer:
  the board outline again, w5

## Silkscreen, mask and mechanical layers (free items; w line width, h text height)
Top Overlay:
  text "D12" at 256,831 h32
  text "D11" at 366,831 h32
  text "D10" at 461,831 h32
  text "D9" at 571,831 h32
  text "D8" at 671,831 h32
  text "D7" at 771,831 h32
  text "D6" at 871,831 h32
  text "D5" at 971,831 h32
  text "D4" at 1071,831 h32
  text "D3" at 1176,831 h32
  text "D2" at 1276,831 h32
  text "GND" at 1356,831 h32
  text "RST" at 1461,831 h32
  text "RX" at 1576,831 h32
  text "TX" at 1671,831 h32
  text "TX" at 1560,735 h32 r270
  text "RX" at 1560,610 h32 r270
  text "PWR" at 1560,485 h32 r270
  text "ICSP" at 1678.01,460 h32 r270
  text "RST" at 1085,410 h32 r270
  text "L" at 1560,320 h32 r270
  text "D13" at 256,141 h32
  text "3V3" at 356,141 h32
  text "REF" at 466,141 h32
  text "A0" at 576,141 h32
  text "A1" at 676,141 h32
  text "A2" at 776,141 h32
  text "A3" at 876,141 h32
  text "A4" at 976,141 h32
  text "A5" at 1076,141 h32
  text "A6" at 1176,141 h32
  text "A7" at 1276,141 h32
  text "5V" at 1371,141 h32
  text "RST" at 1456,141 h32
  text "GND" at 1561,141 h32
  text "VIN" at 1666,141 h32
Board Shape:
  the board outline again, w0.2